# EAGLE board ProyectoFinal (EAGLE 9.4.0)
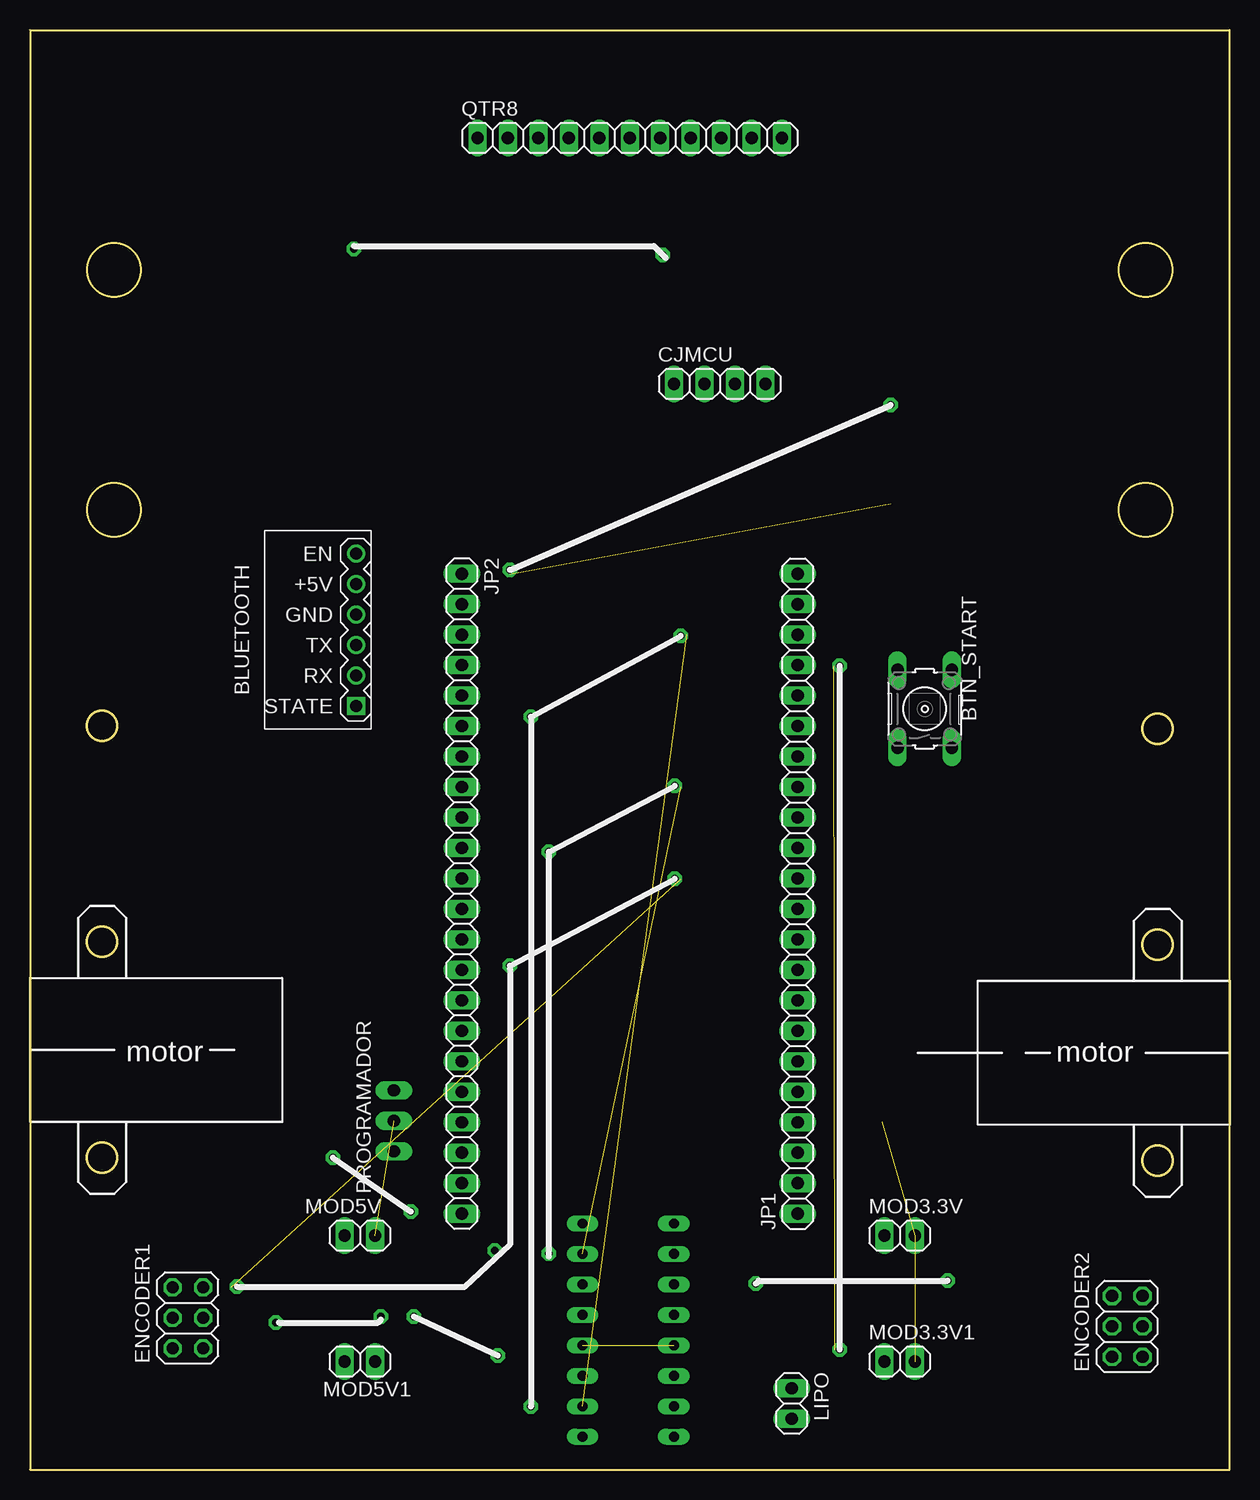
[diagram p0: board, top side]
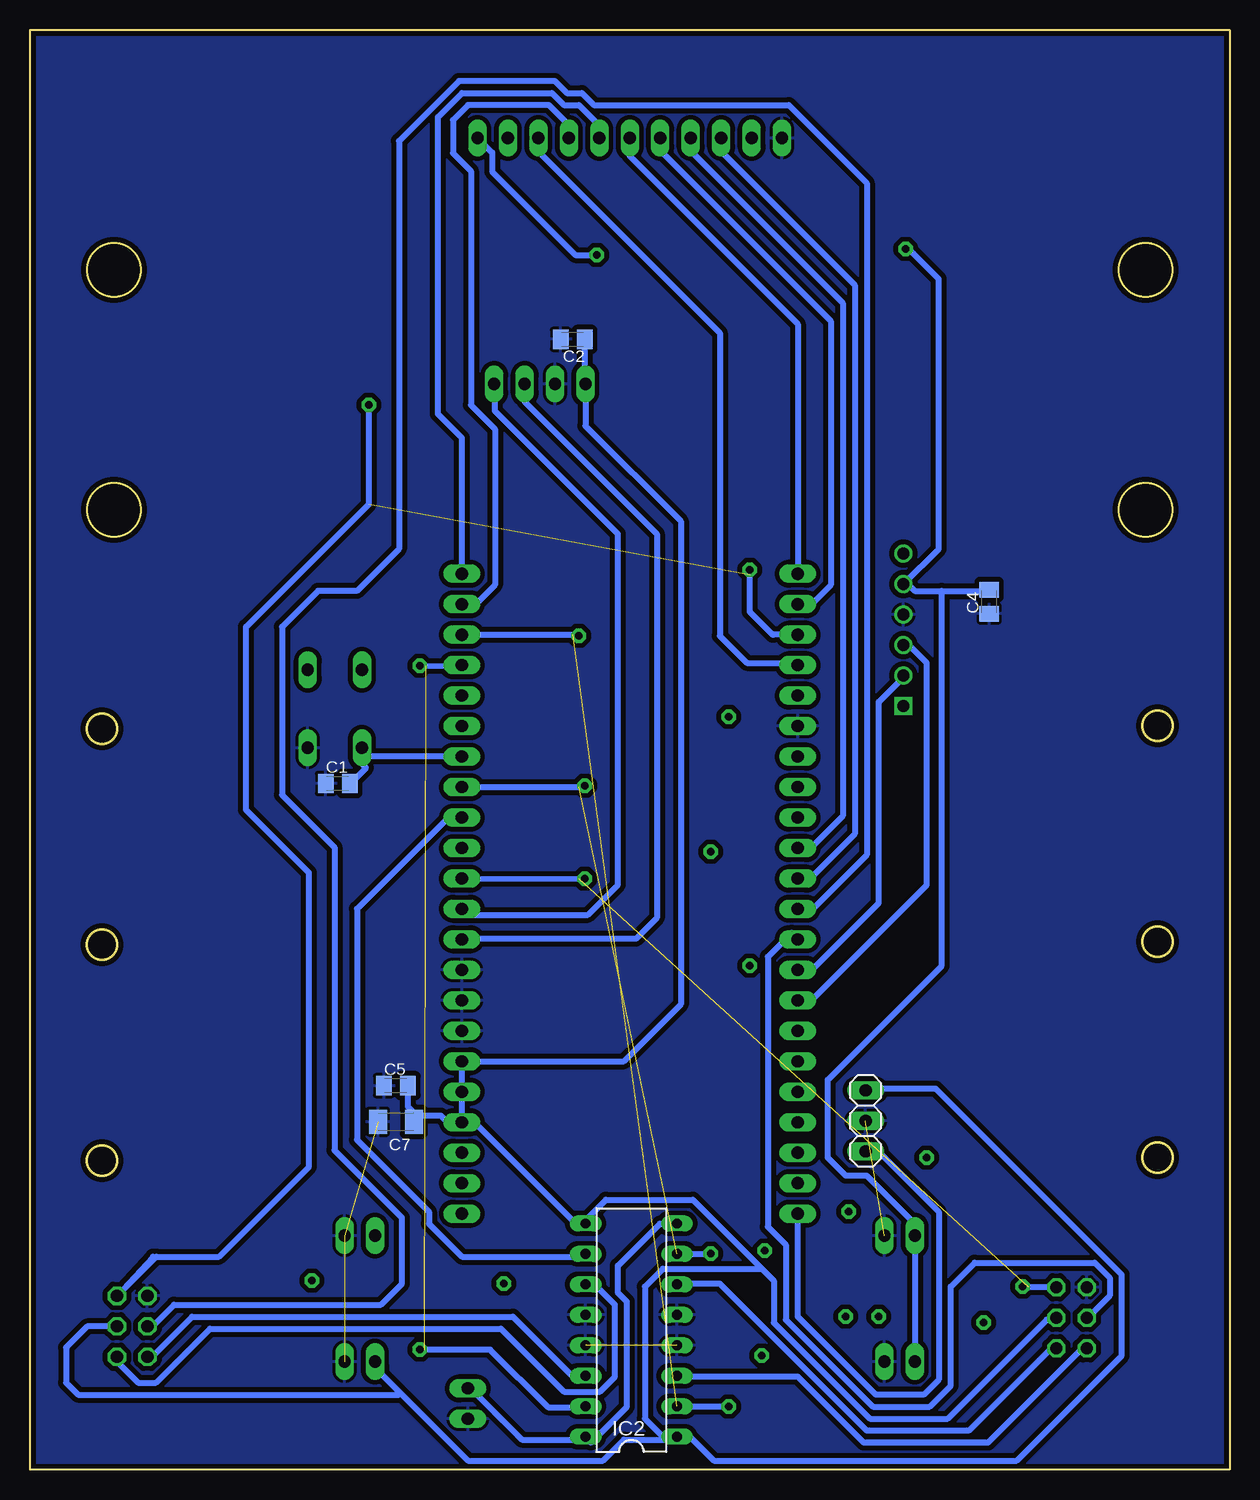
[diagram p1: board, bottom side, seen from below]

Size 100 x 120 mm. Coordinates in mm from the lower left corner, seen from the top.
Outline: 100,0 100,120 0,120 0,0 100,0
Outline: circle at 6,44 radius 1.27
Outline: circle at 6,26 radius 1.25
Outline: circle at 94,43.75 radius 1.25
Outline: circle at 94,25.75 radius 1.27
Outline: circle at 6,62 radius 1.25
Outline: circle at 94,61.75 radius 1.25
Outline: circle at 94,43.75 radius 1.25
Outline: circle at 94,25.75 radius 1.25
Outline: circle at 7,100 radius 2.24
Outline: circle at 7,80 radius 2.24
Outline: circle at 93,100 radius 2.24
Outline: circle at 93,80 radius 2.24
Copper layers (1*16): Top 0.035mm / dielectric 1.5mm / Bottom 0.035mm
Design rules "default *": minimum track width 0.5mm, minimum drill 0.4mm, track to track 0.3mm, track to pad 0.3mm, pad to pad 0.3mm, via to via 0.3mm, smd to smd 6mil, copper to edge 0.2mm, drill to drill 6mil, minimum pad ring 10mil, minimum via ring 8mil, stop-mask expansion 4mil, vias tented up to drill 0mil, thermal gap 10mil

## Footprints (pad centres in the part's own frame; a part is rotated, then mirrored left to right if it is on the bottom)
WIRELESS-BLUETOOTH-HC-05 = drill 1 square: 1 -6.35,-3.175 | drill 1: 2 -3.81,-3.175; 3 -1.27,-3.175; 4 1.27,-3.175; 5 3.81,-3.175; 6 6.35,-3.175
B3F-10XX = drill 1.016 long: 1 -3.251,2.261; 2 3.251,2.261; 3 -3.251,-2.261; 4 3.251,-2.261
C0805K = smd 1.3 x 1.6: 1 -1,0; 2 1,0
C1206K = smd 1.5 x 2: 1 -1.5,0; 2 1.5,0
1X04 = drill 1.016 long: 1 -3.81,0; 2 -1.27,0; 3 1.27,0; 4 3.81,0
2X03 = drill 1.016 octagon: 1 -2.54,-1.27; 2 -2.54,1.27; 3 0,-1.27; 4 0,1.27; 5 2.54,-1.27; 6 2.54,1.27
DIL16 = drill 0.813 long: 1 -8.89,-3.81; 2 -6.35,-3.81; 3 -3.81,-3.81; 4 -1.27,-3.81; 5 1.27,-3.81; 6 3.81,-3.81; 7 6.35,-3.81; 8 8.89,-3.81; 9 8.89,3.81; 10 6.35,3.81; 11 3.81,3.81; 12 1.27,3.81; 13 -1.27,3.81; 14 -3.81,3.81; 15 -6.35,3.81; 16 -8.89,3.81
1X22 = drill 1.016 long: 1 -26.67,0; 2 -24.13,0; 3 -21.59,0; 4 -19.05,0; 5 -16.51,0; 6 -13.97,0; 7 -11.43,0; 8 -8.89,0; 9 -6.35,0; 10 -3.81,0; 11 -1.27,0; 12 1.27,0; 13 3.81,0; 14 6.35,0; 15 8.89,0; 16 11.43,0; 17 13.97,0; 18 16.51,0; 19 19.05,0; 20 21.59,0; 21 24.13,0; 22 26.67,0
1X02 = drill 1.016 long: 1 -1.27,0; 2 1.27,0
1X03 = drill 1.016 long: 1 -2.54,0; 2 0,0; 3 2.54,0
1X11 = drill 1.016 long: 1 -12.7,0; 2 -10.16,0; 3 -7.62,0; 4 -5.08,0; 5 -2.54,0; 6 0,0; 7 2.54,0; 8 5.08,0; 9 7.62,0; 10 10.16,0; 11 12.7,0

## Placement (x,y rotation side)
BLUETOOTH  hc-05  [WIRELESS-BLUETOOTH-HC-05]  24,70 90 top
BTN_START  [B3F-10XX]  74.59,63.41 90 top
C1  0.1uF  [C0805K]  74.35,57.19 0 bottom
C2  0.1uF  [C0805K]  54.76,94.21 180 bottom
C4  0.1uF  [C0805K]  20.04,72.34 90 bottom
C5  0.1uF  [C0805K]  69.5,32 0 bottom
C7  10uF  [C1206K]  69.5,29 0 bottom
CJMCU  [1X04]  57.5,90.5 0 top
ENCODER1  [2X03]  13.16,12.64 90 top
ENCODER2  [2X03]  91.48,11.93 90 top
IC2  L293D  [DIL16]  49.87,11.62 90 bottom
JP1  [1X22]  64,48 90 top
JP2  [1X22]  36,48 270 top
LIPO  [1X02]  63.5,5.5 270 top
MOD3.3V  [1X02]  72.5,19.5 0 top
MOD3.3V1  [1X02]  72.5,9 0 top
MOD5V  [1X02]  27.5,19.5 0 top
MOD5V1  [1X02]  27.5,9 0 top
PROGRAMADOR  [1X03]  30.34,29.07 90 bottom
QTR8  [1X11]  50,111 0 top

## Library data of the parts
BLUETOOTH = diy-modules
BTN_START = switch-omron; MPN: B3F-1000; OC_FARNELL: 176432; OC_NEWARK: 36M3542
C1 C2 C4 C5 C7 = rcl; SPICEPREFIX: C
CJMCU ENCODER1 ENCODER2 JP1 JP2 LIPO MOD3.3V MOD3.3V1 MOD5V MOD5V1 PROGRAMADOR QTR8 = pinhead
IC2 = st-microelectronics; MPN: L293D; OC_FARNELL: 9589619; OC_NEWARK: 56P8249

## Nets
3V3: C2.1 C5.2 C7.2 CJMCU.1 ENCODER1.3 ENCODER2.3 IC2.1 IC2.9 JP1.4 JP1.5 JP1.6 MOD3.3V1.1 PROGRAMADOR.3
5V: BLUETOOTH.5 C4.2 MOD5V1.1 MOD5V.1
7V4: IC2.8 IC2.16 LIPO.1
ADC2: JP2.11 QTR8.3
ADC3: JP2.10 QTR8.4
ADC4: JP2.2 QTR8.5
ADC5: JP2.1 QTR8.6
ADC6: JP1.22 QTR8.7
ADC7: JP1.21 QTR8.8
ADC8: JP2.4 QTR8.9
ADC9: QTR8.10
BKGD: JP2.22 PROGRAMADOR.1
BTN_START: BTN_START.1 C1.2 JP1.16
ENCODER1_1: ENCODER1.4 JP2.13
ENCODER1_2: ENCODER1.5 JP1.12
ENCODER2_1: ENCODER2.4 JP2.12
ENCODER2_2: ENCODER2.5 JP2.3
GND: BLUETOOTH.4 BTN_START.3 C1.1 C2.2 C4.1 C5.1 C7.1 CJMCU.2 ENCODER1.6 ENCODER2.6 IC2.4 IC2.5 IC2.12 IC2.13 JP1.7 JP1.8 JP1.9 JP2.6 LIPO.2 MOD3.3V1.2 MOD3.3V.2 MOD5V1.2 MOD5V.2 PROGRAMADOR.2 QTR8.1
MOTOR1_IN1: IC2.2 JP1.20
MOTOR1_IN2: IC2.7 JP1.15
MOTOR1_OUT1: ENCODER1.1 IC2.6
MOTOR1_OUT2: ENCODER1.2 IC2.3
MOTOR2_IN1: IC2.15 JP1.19
MOTOR2_IN2: IC2.10 JP1.14
MOTOR2_OUT1: ENCODER2.1 IC2.11
MOTOR2_OUT2: ENCODER2.2 IC2.14
N$1: JP1.1
N$2: JP1.2
N$3: JP1.3
N$13: JP1.13
N$17: JP1.17
N$18: JP1.18
N$29: JP2.7
N$30: JP2.8
N$31: JP2.9
N$38: JP2.16
N$39: JP2.17
N$40: JP2.18
N$41: JP2.19
N$42: JP2.20
N$43: JP2.21
R1: QTR8.2
RX_BT: BLUETOOTH.2 JP2.14
S$1: QTR8.11
S$18: MOD3.3V.1
SCL: CJMCU.3 JP1.10
SDA: CJMCU.4 JP1.11
TX_BT: BLUETOOTH.3 JP2.15

## Tracks (layer width: path | path; a pad name or v marks a point on that pad's centre or on a via)
3V3
  Bottom 0.5: 69.12,6.38 70.75,8 70.75,8.75 71,9 MOD3.3V1.1 | 69.12,6.38 63.5,0.75 52.25,0.75 50.5,2.5 46.25,2.5 IC2.1 | PROGRAMADOR.3 30.25,31.75 24.5,31.75 9,16.25 9,9.5 17.75,0.75 43,0.75 45,2.75 46,2.75 IC2.1 | 69.12,6.38 69.25,6.25 96,6.25 97,7.25 97,10.18 95.25,11.93 ENCODER2.3 | 93,11.75 ENCODER2.3 | C2.1 53.75,94 53.75,90.5 CJMCU.1 53.69,87 45.75,79.06 45.75,38.78 50.5,34.03 JP1.6 JP1.5 64,29 | C5.2 68.5,30.25 68,29.75 68,29.5 | 53.75,20.75 54.75,20.75 62.75,28.75 64,28.75 JP1.4 64,29 | 68,29.5 65.75,29.5 65.25,29 64,29 | 68,29.5 C7.2 | 39,16.75 44.75,22.5 52,22.5 53.75,20.75 | 39,16.75 38,15.75 38,12.25 30,4.25 23.5,4.25 15.25,12.5 14.5,12.5 ENCODER1.3 | 53.75,20.75 IC2.9 | ENCODER2.3 93.07,12.25 | IC2.1 47.23,2.73 48.75,4.25 48.75,15.25 47.25,16.75 39,16.75
5V
  Bottom 0.5: 24,73.25 26.25,73.25 27,74 BLUETOOTH.5 24.25,76.73 24.25,99.25 26.5,101.5 | 24,73.25 20.25,73.25 C4.2 | 26.25,19.5 26.25,9 MOD5V1.1 | 24,73.25 24,42 33.5,32.5 33.5,26 32,24.5 30.25,24.5 26.5,20.75 26.5,19.75 26.25,19.5 | 26.25,19.5 MOD5V.1
7V4
  Bottom 0.5: LIPO.1 63.5,6.75 63.25,6.75 59,2.5 53.75,2.5 IC2.16 53.5,2.5 53.25,2.25 50.25,5.25 50.25,14 51,14.75 51,17 47.5,20.5 46.25,20.5 IC2.8
ADC2
  Bottom 0.5: JP2.11 36,49.5 34.75,49.5 31.25,53 31.25,98.75 42.25,109.75 42.25,111 QTR8.3
ADC3
  Bottom 0.5: JP2.10 36,52 34.75,52 32.25,54.5 32.25,97.25 44.75,109.75 44.75,111 QTR8.4
ADC4
  Bottom 0.5: JP2.2 36,72.25 34.75,72.25 33.25,73.75 33.25,95.75 47.25,109.75 47.25,111 QTR8.5
ADC5
  Bottom 0.5: JP2.1 36,95.5 50,109.5 QTR8.6
ADC6
  Bottom 0.5: QTR8.7 52.75,111 52.75,112.25 54.25,113.75 55.5,113.75 56.5,114.75 64,114.75 66,112.75 66,88 64,86 JP1.22
ADC7
  Bottom 0.5: JP1.21 64,72.25 62.75,72.25 61.25,73.75 61.25,86.75 63.25,88.75 63.25,108.25 64.75,109.75 64.75,112.5 63.5,113.75 56.75,113.75 55.25,112.25 55.25,111 QTR8.8
ADC8
  Bottom 0.5: JP2.4 36,67.25 40.25,67.25 42.5,69.5 42.5,94.75 57.5,109.75 57.5,111 QTR8.9
BKGD
  Bottom 0.5: JP2.22 36,12.75 29.5,6.25 25.5,6.25 24.25,7.5 24.25,21.5 29,26.25 30,26.25 30.25,26.5 PROGRAMADOR.1
BTN_START
  Bottom 0.5: 72.25,59.5 72.25,60 BTN_START.1 72.25,59.5 | 72.25,59.5 72.25,58.75 72,58.5 73.25,57.25 C1.2 | 72.25,59.5 64,59.5 JP1.16
ENCODER1_1
  Bottom 0.5: ENCODER1.4 11.75,12.75 10,14.5 10,16 11.25,17.25 21.25,17.25 23.25,15.25 23.25,7 25,5.25 29.75,5.25 37,12.5 37,18.75 38.5,20.25 38.5,42.75 36.5,44.75 36,44.25 JP2.13
ENCODER1_2  (1 unrouted)
  Bottom 0.5: ENCODER1.5 16.75,15.18 | JP1.12 54.25,49.25
ENCODER2_1
  Bottom 0.5: JP2.12 36,46.75 34.75,46.75 30.25,51.25 30.25,107.25 36.75,113.75 53,113.75 54,114.75 55.25,114.75 56.25,115.75 64.25,115.75 69.25,110.75 69.25,76.75 72.75,73.25 76,73.25 79,70.25 79,56.25 74.62,51.88 74.62,26.62 69,21 69,15.5 70.75,13.75 88,13.75 90,11.75 ENCODER2.4
ENCODER2_2  (1 unrouted)
  Bottom 0.5: 38,69.59 JP2.3 38.09,69.59 40,71.5 40,74.6 | 89.75,17.75 ENCODER2.5 89.47,17.75 84.25,17.75 76.75,25.25 76.75,49.75 82,55 82,70.25 71.75,80.5 71.75,88.35
GND  (4 unrouted)
  pour Bottom (isolate 0.406): -4.25,113.5 -4.25,122.5 102.75,122.5 102.75,-3.25 94.25,-3.25 -4.5,-3.25 -4.5,36.25 -4.5,113.5
MOTOR1_IN1  (1 unrouted)
  Bottom 0.5: IC2.2 42.15,5.27 | JP1.20 54.75,69.59
MOTOR1_IN2  (1 unrouted)
  Bottom 0.5: IC2.7 43.75,17.97 | JP1.15 54.25,56.89
MOTOR1_OUT1
  Bottom 0.5: IC2.6 46,15.5 42.5,15.5 30.25,3.25 21.75,3.25 14.75,10.25 14.5,10 ENCODER1.1
MOTOR1_OUT2
  Bottom 0.5: IC2.3 46,7.75 36,7.75 30.5,2.25 20.14,2.25 12.29,10.1 ENCODER1.2
MOTOR2_IN1  (1 unrouted)
  Bottom 0.5: JP1.19 67,67 | IC2.15 53.75,5.2 56.83,5.2 61.63,10 67.1,10
MOTOR2_IN2
  Bottom 0.5: IC2.10 53.75,17.75 64,17.75 66.75,20.5 66.75,21.5 72.75,27.5 72.75,46.75 64.75,54.75 64.25,54.75 64,54.5 JP1.14
MOTOR2_OUT1
  Bottom 0.5: ENCODER2.1 92.75,9 91,7.25 89.5,7.25 85,11.75 60.75,11.75 55.5,6.5 52.5,6.5 51.25,7.75 51.25,13.75 52.75,15.25 53.5,15.25 IC2.11
MOTOR2_OUT2
  Bottom 0.5: IC2.14 53.75,7.75 54.75,7.75 59.75,12.75 86.5,12.75 90,9.25 ENCODER2.2
RX_BT
  Bottom 0.5: BLUETOOTH.2 27.25,66 29.25,64 29.25,47.25 35.25,41.25 35.75,41.25 36,41.5 JP2.14
S$1
  Bottom 0.5: QTR8.11 61.47,109.77 61.47,108.19 54.53,101.25 53.25,101.25
S$2  (via drill 0.6 pad 1.2)
  other vias: 27,101.75
S$3  (via drill 0.6 pad 1.2)
  other vias: 52.75,101.25
S$4  (via drill 0.6 pad 1.2)
  other vias: 43.25,18
S$5  (via drill 0.6 pad 1.2)
  other vias: 41.75,5.25
S$6  (via drill 0.6 pad 1.2)
  other vias: 41.75,62.75
S$7  (via drill 0.6 pad 1.2)
  other vias: 43.25,51.5
S$8  (via drill 0.6 pad 1.2)
  other vias: 67.5,10
S$9  (via drill 0.6 pad 1.2)
  other vias: 40,75
S$10  (via drill 0.6 pad 1.2)
  other vias: 17.25,15.25
S$11  (via drill 0.6 pad 1.2)
  other vias: 54.25,69.5
S$12  (via drill 0.6 pad 1.2)
  other vias: 40,42
S$13  (via drill 0.6 pad 1.2)
  other vias: 67.5,67
S$14  (via drill 0.6 pad 1.2)
  other vias: 53.75,57
S$15  (via drill 0.6 pad 1.2)
  other vias: 53.75,49.25
S$16  (via drill 0.6 pad 1.2)
  other vias: 38.75,18.25
S$17  (via drill 0.6 pad 1.2)
  other vias: 71.75,88.75
S$18
  Bottom 0.5: 71.25,19.5 MOD3.3V.1
S$19  (via drill 0.6 pad 1.2)
  other vias: 60.5,15.5
S$20  (via drill 0.6 pad 1.2)
  other vias: 76.5,15.75
S$21  (via drill 0.6 pad 1.2)
  other vias: 20.5,12.25
S$22  (via drill 0.6 pad 1.2)
  other vias: 29.25,12.75
S$23  (via drill 0.6 pad 1.2)
  other vias: 25.25,26
S$24  (via drill 0.6 pad 1.2)
  other vias: 31.75,21.5
S$25  (via drill 0.6 pad 1.2)
  other vias: 32,12.75
S$26  (via drill 0.6 pad 1.2)
  other vias: 39,9.5
SCL
  Bottom 0.5: JP1.10 64,44.25 49.5,44.25 47.75,46 47.75,78 58.75,89 58.75,90.5 CJMCU.3
SDA
  Bottom 0.5: CJMCU.4 61.25,90.5 61.25,88.25 51,78 51,48.75 53.5,46.25 63.75,46.25 64,46.5 JP1.11
TX_BT
  Bottom 0.5: BLUETOOTH.3 27,68.5 26.5,68.5 25.25,67.25 25.25,48.75 35.25,38.75 35.75,38.75 36,39 JP2.15

## Text on the board
tPlace: motor | motor